# EAGLE board C7 (EAGLE 7.5.0)
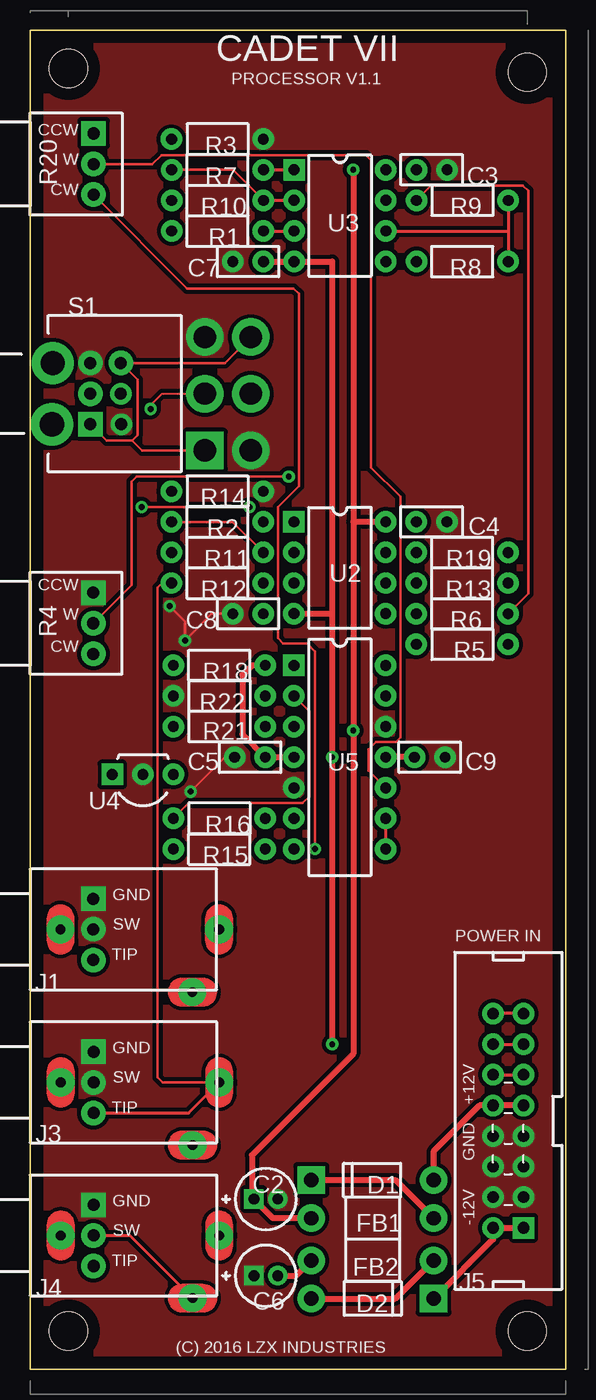
[diagram p0: board, top side]
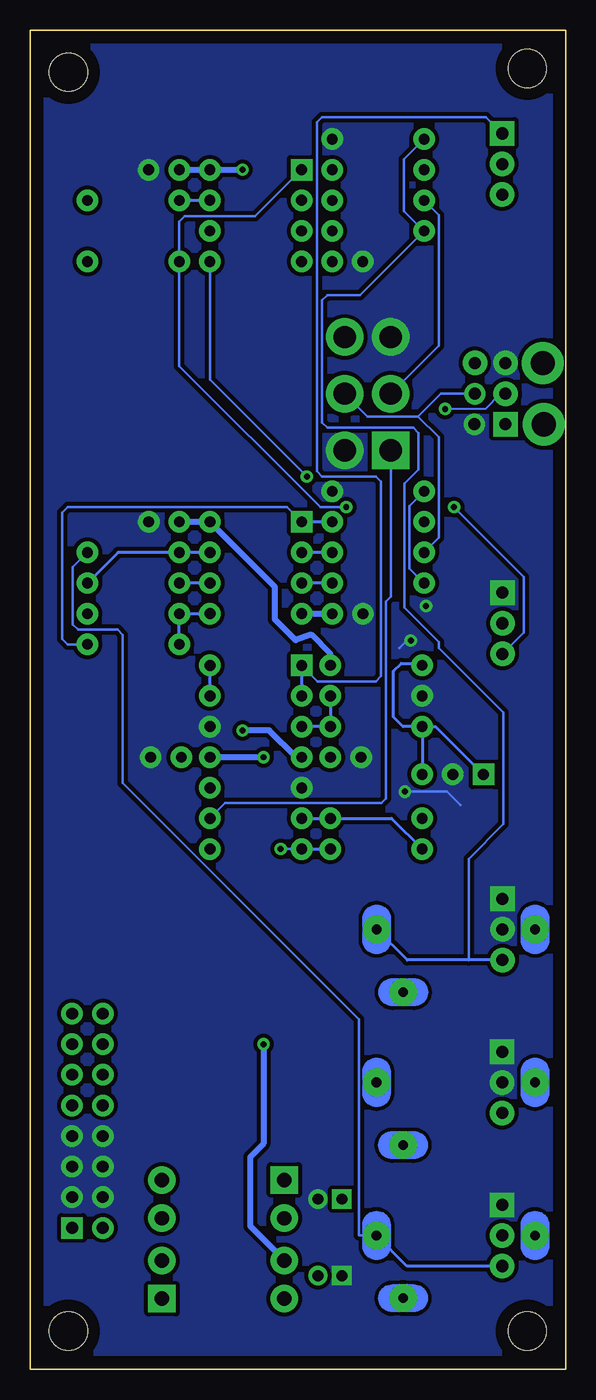
[diagram p1: board, bottom side, seen from below]

Size 44.45 x 111.12 mm. Coordinates in mm from the lower left corner, seen from the top.
Outline: 0,0 44.45,0 44.45,111.12 0,111.12 0,0
Copper layers (1*16): Top 0.035mm / dielectric 1.5mm / Bottom 0.035mm
Design rules "default *": minimum track width 10mil, minimum drill 0.61mm, track to track 8mil, track to pad 8mil, pad to pad 8mil, via to via 8mil, smd to smd 8mil, copper to edge 40mil, drill to drill 8mil, minimum pad ring 0mil, minimum via ring 8mil, stop-mask expansion 2mil, vias tented up to drill 19mil, thermal gap 10mil
Net classes: 0 Default: width 0.203 mm, clearance 0.229 mm, clearance 0.229 mm to class 1; 1 Power Rails: width 0.508 mm, clearance 0.203 mm, clearance 0.203 mm to class 0
Holes 3.17 mm at 3.17,3.18 3.17,107.95 41.27,3.18 41.27,107.63

## Footprints (pad centres in the part's own frame; a part is rotated, then mirrored left to right if it is on the bottom)
CAPPR-2/5.08 = drill 0.9 pad 1.6 square: 1 -0.991,0 | drill 0.9 pad 1.6: 2 0.991,0
CAP-2.54/6.6x3 = drill 0.889 pad 1.778: 1 -1.27,0; 2 1.27,0
CAP-2.54/6.6x3_C5 = drill 0.889 pad 1.778: 1 -1.27,0; 2 1.27,0
CAPPR-2/5.08_C6 = drill 0.9 pad 1.6 square: 1 -0.991,0 | drill 0.9 pad 1.6: 2 0.991,0
CAP-2.54/6.6x3_C7 = drill 0.889 pad 1.778: 1 -1.27,0; 2 1.27,0
CAP-2.54/6.6x3_C9 = drill 0.889 pad 1.778: 1 -1.27,0; 2 1.27,0
DO-41 = drill 1.2 pad 2.286 square: 1 -5.08,0 | drill 1.2 pad 2.286: 2 5.08,0
DO-41_D2 = drill 1.2 pad 2.286 square: 1 -5.08,0 | drill 1.2 pad 2.286: 2 5.08,0
FB-10.16/4.45x3.5 = drill 1.194 pad 2.286: 1 -5.08,0; 2 5.08,0
PJ302M = drill 0.8 pad 2.286: 1A 2.54,0; 2A 13.487,-5.207; 3A 15.697,0 | drill 1 pad 2.032 square: 1B 5.258,2.54 | drill 1 pad 2.032: 2B 5.258,0; 3B 5.258,-2.54
PJ302M_J4 = drill 0.8 pad 2.286: 1A 2.54,0; 2A 13.487,-5.207; 3A 15.697,0 | drill 1 pad 2.032 square: 1B 5.258,2.54 | drill 1 pad 2.032: 2B 5.258,0; 3B 5.258,-2.54
IDC16M = drill 0.965 pad 1.778 square: 1 8.89,1.27 | drill 0.965 pad 1.778: 2 8.89,-1.27; 3 6.35,1.27; 4 6.35,-1.27; 5 3.81,1.27; 6 3.81,-1.27; 7 1.27,1.27; 8 1.27,-1.27; 9 -1.27,1.27; 10 -1.27,-1.27; 11 -3.81,1.27; 12 -3.81,-1.27; 13 -6.35,1.27; 14 -6.35,-1.27; 15 -8.89,1.27; 16 -8.89,-1.27
RES-7.62/5.1x2.5 = drill 0.889 pad 1.778: 1 -3.81,0; 2 3.81,0
RES-7.62/5.1x2.5_R3 = drill 0.889 pad 1.778: 1 -3.81,0; 2 3.81,0
ALPHA9H = drill 1 pad 2.032 square: 1 5.258,2.54 | drill 1 pad 2.032: 2 5.258,0; 3 5.258,-2.54
7201-A = drill 1.85 pad 3.1 square: 1 -4.7,-14.528 | drill 1 pad 2.032 square: 1B -2.54,-5 | drill 1.85 pad 3.1: 2 0,-14.528; 3 4.7,-14.528; 4 -4.7,-18.338; 5 0,-18.338; 6 4.7,-18.338 | drill 1 pad 2.032: 2B 0,-5; 3B 2.54,-5; 6B 2.54,-7.54 | drill 1 pad 1.778: 4B -2.54,-7.584; 5B 0,-7.54 | drill 2 pad 3.5: 7 2.54,-1.894; 8 -2.54,-1.828
DIP-8 = drill 0.9 pad 1.778 square: 1 -3.81,3.81 | drill 0.9 pad 1.778: 2 -3.81,1.27; 3 -3.81,-1.27; 4 -3.81,-3.81; 5 3.81,-3.81; 6 3.81,-1.27; 7 3.81,1.27; 8 3.81,3.81
TO-92-100R = drill 0.889 pad 1.778 square: 1 2.54,0 | drill 0.889 pad 1.778: 2 0,0; 3 -2.54,0
DIP-14 = drill 0.9 pad 1.778 square: 1 -3.81,7.62 | drill 0.9 pad 1.778: 2 -3.81,5.08; 3 -3.81,2.54; 4 -3.81,0; 5 -3.81,-2.54; 6 -3.81,-5.08; 7 -3.81,-7.62; 8 3.81,-7.62; 9 3.81,-5.08; 10 3.81,-2.54; 11 3.81,0; 12 3.81,2.54; 13 3.81,5.08; 14 3.81,7.62

## Placement (x,y rotation side)
C2  10u 25V  [CAPPR-2/5.08]  19.57,14.12 0 top
C3  100n  [CAP-2.54/6.6x3]  33.34,99.54 0 top
C4  100n  [CAP-2.54/6.6x3]  33.33,70.32 0 top
C5  100n  [CAP-2.54/6.6x3_C5]  18.25,50.8 180 top
C6  10u 25V  [CAPPR-2/5.08_C6]  19.57,7.77 0 top
C7  100n  [CAP-2.54/6.6x3_C7]  18.1,91.92 0 top
C8  100n  [CAP-2.54/6.6x3_C7]  18.09,62.7 0 top
C9  100n  [CAP-2.54/6.6x3_C9]  33.17,50.8 180 top
D1  1N4001  [DO-41]  28.42,15.71 0 top
D2  1N4001  [DO-41_D2]  28.42,5.87 180 top
FB1  68R  [FB-10.16/4.45x3.5]  28.42,12.54 180 top
FB2  68R  [FB-10.16/4.45x3.5]  28.42,9.05 180 top
J1  PJ302M  [PJ302M]  -0.01,36.51 0 top
J3  PJ302M  [PJ302M]  0,23.81 0 top
J4  PJ302M  [PJ302M_J4]  0,11.11 0 top
J5  EUROPWR16  [IDC16M]  39.69,20.63 270 top
R1  499R  [RES-7.62/5.1x2.5]  15.56,94.46 0 top
R2  1K  [RES-7.62/5.1x2.5]  15.55,70.32 0 top
R3  100K  [RES-7.62/5.1x2.5_R3]  15.55,102.08 180 top
R4  B10K  [ALPHA9H]  -0.01,61.91 0 top
R5  1K  [RES-7.62/5.1x2.5_R3]  35.87,60.16 180 top
R6  1K  [RES-7.62/5.1x2.5]  35.87,62.7 0 top
R7  1K  [RES-7.62/5.1x2.5]  15.56,99.54 0 top
R8  10K  [RES-7.62/5.1x2.5]  35.88,91.92 0 top
R9  10K  [RES-7.62/5.1x2.5_R3]  35.88,97 180 top
R10  1K  [RES-7.62/5.1x2.5]  15.56,97 0 top
R11  1K  [RES-7.62/5.1x2.5]  15.55,67.78 0 top
R12  499R  [RES-7.62/5.1x2.5]  15.55,65.24 0 top
R13  1K  [RES-7.62/5.1x2.5]  35.87,65.24 0 top
R14  100K  [RES-7.62/5.1x2.5_R3]  15.55,72.86 180 top
R15  1K  [RES-7.62/5.1x2.5]  15.71,43.18 0 top
R16  1K  [RES-7.62/5.1x2.5_R3]  15.71,45.72 180 top
R18  4.99K  [RES-7.62/5.1x2.5]  15.71,58.42 0 top
R19  499R  [RES-7.62/5.1x2.5]  35.87,67.78 0 top
R20  B10K  [ALPHA9H]  0,100.01 0 top
R21  15K  [RES-7.62/5.1x2.5_R3]  15.71,53.34 180 top
R22  10K  [RES-7.62/5.1x2.5_R3]  15.71,55.88 180 top
S1  7201MD9ABE  [7201-A]  -0.01,80.96 90 top
U2  LM6172  [DIP-8]  25.71,66.51 0 top
U3  LM6172  [DIP-8]  25.72,95.73 0 top
U4  TL431  [TO-92-100R]  9.36,49.37 180 top
U5  TL074CN  [DIP-14]  25.71,50.8 0 top

## Library data of the parts
C2-C9 D1 D2 J5 R1-R3 R5-R16 R18 R19 R21 R22 = common
FB1 FB2 = common; MANUFACTURER: Fair-Rite
J1 J3 J4 = common; DATASHEET: http://www.thonk.co.uk/shop/pj302m/
R4 R20 = common; DATASHEET: http://www.thonk.co.uk/shop/alpha-9mm-pots/; MANUFACTURER: Alpha
S1 = common; DATASHEET: http://datasheets.diptrace.com/switches/7000_series.pdf; MANUFACTURER: C&K
U2 U3 = common; DATASHEET: http://www.ti.com/lit/gpn/lm6172; MANUFACTURER: Texas Instruments
U4 = common; DATASHEET: http://datasheets.diptrace.com\st_micro\CD00000986.pdf; MANUFACTURER: ST Microelectronics
U5 = common; MANUFACTURER: Motorola

## Nets
0V: C2.2 C3.2 C4.2 C5.2 C6.1 C7.1 C8.1 C9.1 J1.1A J1.1B J1.2A J1.2B J3.1A J3.1B J3.2A J3.2B J4.1A J4.1B J5.3 J5.4 J5.5 J5.6 J5.7 J5.8 R3.1 R4.1 R14.1 R22.2 S1.3 S1.3B S1.4 S1.4B U4.2 U5.5 U5.12
+12V [Power Rails]: C2.1 C3.1 C4.1 C5.1 FB1.2 R18.2 U2.8 U3.8 U5.4
-12V [Power Rails]: C6.2 C7.2 C8.2 C9.2 FB2.2 U2.4 U3.4 U5.11
BUFFERED_VC_TO_FADER: R6.2 R9.2 U3.7
Net_0: R12.2 U2.3
Net_1: D2.2 FB2.1
Net_2: D1.1 FB1.1
Net_3: R2.1 R11.2 U2.2
Net_4: R16.2 R20.1 U5.1 U5.2
Net_5: D2.1 J5.1 J5.2
Net_6: R15.2 R20.3 U5.7
Net_7: R20.2 U5.10
Net_8: S1.1 S1.1B S1.6 S1.6B U5.8 U5.9
Net_9: J5.11 J5.12
Net_10: R1.2 U3.3
Net_11: J5.13 J5.14
Net_21: R13.2 R19.1 U2.7
Net_23: R4.2 U3.5
Net_24: R2.2 R5.1 U2.1
Net_25: R13.1 U2.6
Net_26: R5.2 R6.1 U2.5
Net_27: R15.1 R16.1 U5.6
Net_28: R10.1 S1.2 S1.2B
Net_29: U5.13 U5.14
Net_30: R21.1 R22.1 U5.3
Net_31: R11.1 S1.5 S1.5B
Net_32: J4.2A J4.2B
Net_33: D1.2 J5.9 J5.10
Net_34: J4.3A J4.3B R19.2
Net_35: J5.15 J5.16
Net_50: R18.1 R21.2 U4.1 U4.3
Net_52: R7.1 R10.2 U3.2
Net_53: R4.3 R7.2 R8.1 U3.1
Net_54: R8.2 R9.1 U3.6
Net_58: J1.3A J1.3B R1.1 R3.2
Net_64: J3.3A J3.3B R12.1 R14.2

## Tracks (layer width: path | path; a pad name or v marks a point on that pad's centre or on a via)
0V  (via drill 0.49 pad 1.02)
  Top 0.203: C5.2 16.19,50.8 v13.33,47.94 | C8.1 15.08,62.7 v12.85,60.48 12.85,62.07 v11.58,63.34
  Bottom 0.203: v13.33,47.94 9.84,47.94 8.73,46.83 | v12.85,60.48 13.17,60.48 13.81,59.85 | v11.58,63.34 11.42,63.34 11.27,63.5
  pour Top (isolate 0.33): 0.95,110.17 43.34,110.18 43.34,0.95 0.95,0.95 0.95,9.21
  pour Bottom (isolate 0.33): 0.95,110.17 43.34,110.18 43.34,0.95 0.95,0.95 0.95,9.21
+12V  (via drill 0.49 pad 1.02)
  Top 0.508: FB1.2 20.16,12.54 C2.1 18.41,14.29 18.41,17.77 26.82,26.19 v26.82,53.02 26.82,70.32 | C5.1 U5.4 | U5.4 | v26.82,99.54 26.82,70.32 | U2.8 26.82,70.32 | C5.1 U5.4 | R18.2 18.41,58.42 17.62,57.62 17.62,52.7 C5.1
  Bottom 0.508: C4.1 U2.8 24.12,64.93 24.12,62.23 22.4,60.51 21.11,60.95 19.52,59.37 R18.2 | C4.1 | C3.1 U3.8 v26.82,99.54 | U5.4 22.38,50.8 24.6,53.02 v26.82,53.02
-12V  (via drill 0.49 pad 1.02)
  Top 0.508: C6.2 22.07,7.77 FB2.2 | C9.2 U5.11 | C7.2 U3.4 25.08,91.92 25.08,62.7 | 25.08,62.7 v25.08,50.8 v25.08,26.98 | U2.4 25.08,62.7
  Bottom 0.508: U2.4 C8.2 | v25.08,26.98 25.08,18.72 26.19,17.61 26.19,11.89 FB2.2 | U5.11 v25.08,50.8
BUFFERED_VC_TO_FADER
  Top 0.203: R9.2 33.29,98.22 40.91,98.22 41.34,97.79 41.34,64.36 R6.2
  Bottom 0.254: R9.2 U3.7 | U3.7
Net_0
  Bottom 0.254: R12.2 U2.3 | U2.3
Net_1
  Top 0.508: D2.2 30.32,5.87 FB2.1
Net_2
  Top 0.508: D1.1 30.32,15.71 FB1.1
Net_3
  Top 0.203: R11.2 16.82,70.32 R2.1
  Bottom 0.254: R11.2 U2.2
Net_4
  Top 0.203: U5.2 23.17,54.61 23.17,47.56 22.6,46.99 13.17,46.99 R16.2
  Bottom 0.203: U5.1 20.58,57.1 15.76,57.1 15.33,57.53 15.33,73.65 15.76,74.08 20.21,74.08 20.64,74.52 20.64,103.47 20.21,103.9 6.6,103.9 R20.1
  Bottom 0.254: U5.1 U5.2
Net_5
  Top 0.508: D2.1 38.42,10.79 J5.2 J5.1
Net_6  (via drill 0.49 pad 1.02)
  Top 0.203: v23.65,43.17 23.32,43.2 23.65,43.26 23.65,59.58 22.98,60.24 21.01,60.24 20.58,60.67 20.58,71.54 22.32,73.28 22.32,89.26 21.88,89.69 13.04,89.69 R20.3
  Bottom 0.203: U5.7 v23.65,43.18 v23.65,43.17
  Bottom 0.254: U5.7 R15.2
Net_7
  Top 0.203: U5.10 28.09,49.68 28.09,51.43 28.73,52.07 30.36,52.07 30.74,52.45 30.74,72.4 28.3,74.84 28.3,100.33 27.87,100.76 10.9,100.76 10.15,100.01 R20.2
Net_8
  Top 0.203: S1.1B 6.34,77.07 8.49,77.07 | 8.49,77.07 8.92,77.5 8.92,82.11 S1.6B 16.17,83.5 S1.6 | S1.1 9.3,76.26 8.49,77.07
  Top 0.254: U5.8 U5.9
  Bottom 0.203: S1.1 14.52,64.11 14.9,63.73 14.9,47.37 15.28,46.99 28.25,46.99 U5.9
Net_9
  Top 0.254: J5.12 J5.11
Net_10
  Top 0.254: R1.2 U3.3
Net_11
  Top 0.254: J5.14 J5.13
Net_21
  Bottom 0.254: U2.7 R19.1 | R19.1 | R19.1 37.14,67.78 R13.2
Net_23  (via drill 0.49 pad 1.02)
  Top 0.203: v21.48,74.08 8.85,74.08 8.42,73.65 8.42,65.08 R4.2
  Bottom 0.203: v21.48,74.08 29.53,82.14 U3.5
Net_24
  Bottom 0.203: U2.1 23.12,71.54 41.34,71.54 41.77,71.11 41.77,60.59 41.34,60.16 R5.1
  Bottom 0.254: R2.2 U2.1
Net_25
  Bottom 0.254: U2.6 R13.1
Net_26
  Bottom 0.254: R5.2 R6.1 U2.5
Net_27
  Bottom 0.254: U5.6 R16.1 14.44,45.72 R15.1
Net_28  (via drill 0.49 pad 1.02)
  Top 0.178: v10,79.69 10,80.01 10.95,80.96 S1.2
  Bottom 0.178: S1.2B 5.4,80.96 6.66,79.69 v10,79.69
  Bottom 0.203: S1.2 10.53,84.94 10.53,95.78 R10.1
Net_29
  Bottom 0.254: U5.13 U5.14
Net_30
  Bottom 0.254: R22.1 R21.1 U5.3
Net_31
  Bottom 0.203: R11.1 10.52,69 10.52,77.36 12.24,79.08 | 12.24,79.08 16.45,79.08 S1.5 | 12.24,79.08 10.36,80.96 S1.5B
Net_32
  Top 0.254: J4.2B 8.28,11.11 J4.2A
Net_33
  Top 0.508: J5.9 J5.10 37.3,21.9 33.49,18.09 D1.2
Net_34
  Bottom 0.203: J4.3A 17.17,11.11 17.17,29.04 36.77,48.64 36.77,60.95 37.2,61.38 40.47,61.38 40.9,61.81 40.9,66.56 R19.2
  Bottom 0.254: J4.3B 13.16,8.57 J4.3A
Net_35
  Top 0.254: J5.15 J5.16
Net_50
  Bottom 0.254: R21.2 U4.3 | R21.2 10.79,53.34 U4.1 | R21.2 13.49,53.34 14.28,54.13 14.28,57.94 13.65,58.58 12.06,58.58 R18.1
Net_52
  Top 0.203: R10.2 16.83,99.54 R7.1
  Top 0.254: R10.2 U3.2
Net_53  (via drill 0.49 pad 1.02)
  Top 0.203: v9.26,71.54 v18.21,71.54
  Top 0.254: R7.2 U3.1
  Bottom 0.203: U3.1 25.77,95.68 31.64,95.68 32.07,95.25 R8.1 32.07,83.25 20.36,71.54 v18.21,71.54 | v9.26,71.54 3.47,65.75 3.47,61.14 R4.3
Net_54
  Top 0.254: R9.1 39.69,94.46 | 39.69,94.46 R8.2 | U3.6 39.69,94.46
Net_58
  Bottom 0.203: R3.2 13.4,100.42 13.4,96.11 R1.1 17.06,89.15 19.78,89.15 20.21,88.72 20.21,78.57 19.78,78.14 12.64,78.14 12.2,77.7 12.2,74.68 13.39,73.49 13.39,63.21 10.52,60.34 10.52,59.88 5.17,54.52 5.17,45.24 8.04,42.37 8.04,33.97
  Bottom 0.254: J1.3B 8.04,33.97 13.15,33.97 J1.3A
Net_64
  Top 0.203: J3.3A 11.01,23.81 10.58,24.24 10.58,64.88 11.74,66.04 R12.1
  Top 0.254: J3.3B 13.16,21.27 J3.3A
  Bottom 0.203: R12.1 12.96,66.46 12.96,71.64 R14.2

## Text on the board
tPlace: CADET VII | PROCESSOR V1.1 | CCW | W | R3 | CW | R20 | R7 | C3 | R10 | R9 | U3 | R1 | C7 | R8 | S1 | R14 | C4 | R2 | R11 | R19 | CCW | U2 | W | R12 | R13 | C8 | R6 | CW | R4 | R5 | R18 | R22 | R21 | C5 | U5 | C9 | U4 | R16 | R15 | GND | SW | POWER IN | TIP | J1 | GND | SW | TIP | +12V | J3 | GND | GND | C2 | D1 | SW | FB1 | -12V | TIP | FB2 | J5 | J4 | C6 | D2 | (C) 2016 LZX INDUSTRIES
tDocu: R3 | R20 | R7 | C3 | R10 | R9 | U3 | R1 | C7 | R8 | S1 | R14 | C4 | R2 | R11 | R19 | U2 | R12 | R13 | C8 | R6 | R4 | R5 | R18 | R22 | R21 | C5 | U5 | C9 | U4 | R16 | R15 | J1 | J3 | C2 | D1 | FB1 | FB2 | J5 | J4 | C6 | D2